# Altium PCB CoolantMonitor_MainBoard.PcbDoc
Units mil, origin at the board's own origin, x right, y up, seen from the top; angles counter-clockwise.
Board outline 4250 x 2625 mil, 2 copper layers (Top Layer, Bottom Layer); 46 components, 30 nets, 159 pads, 2 vias.
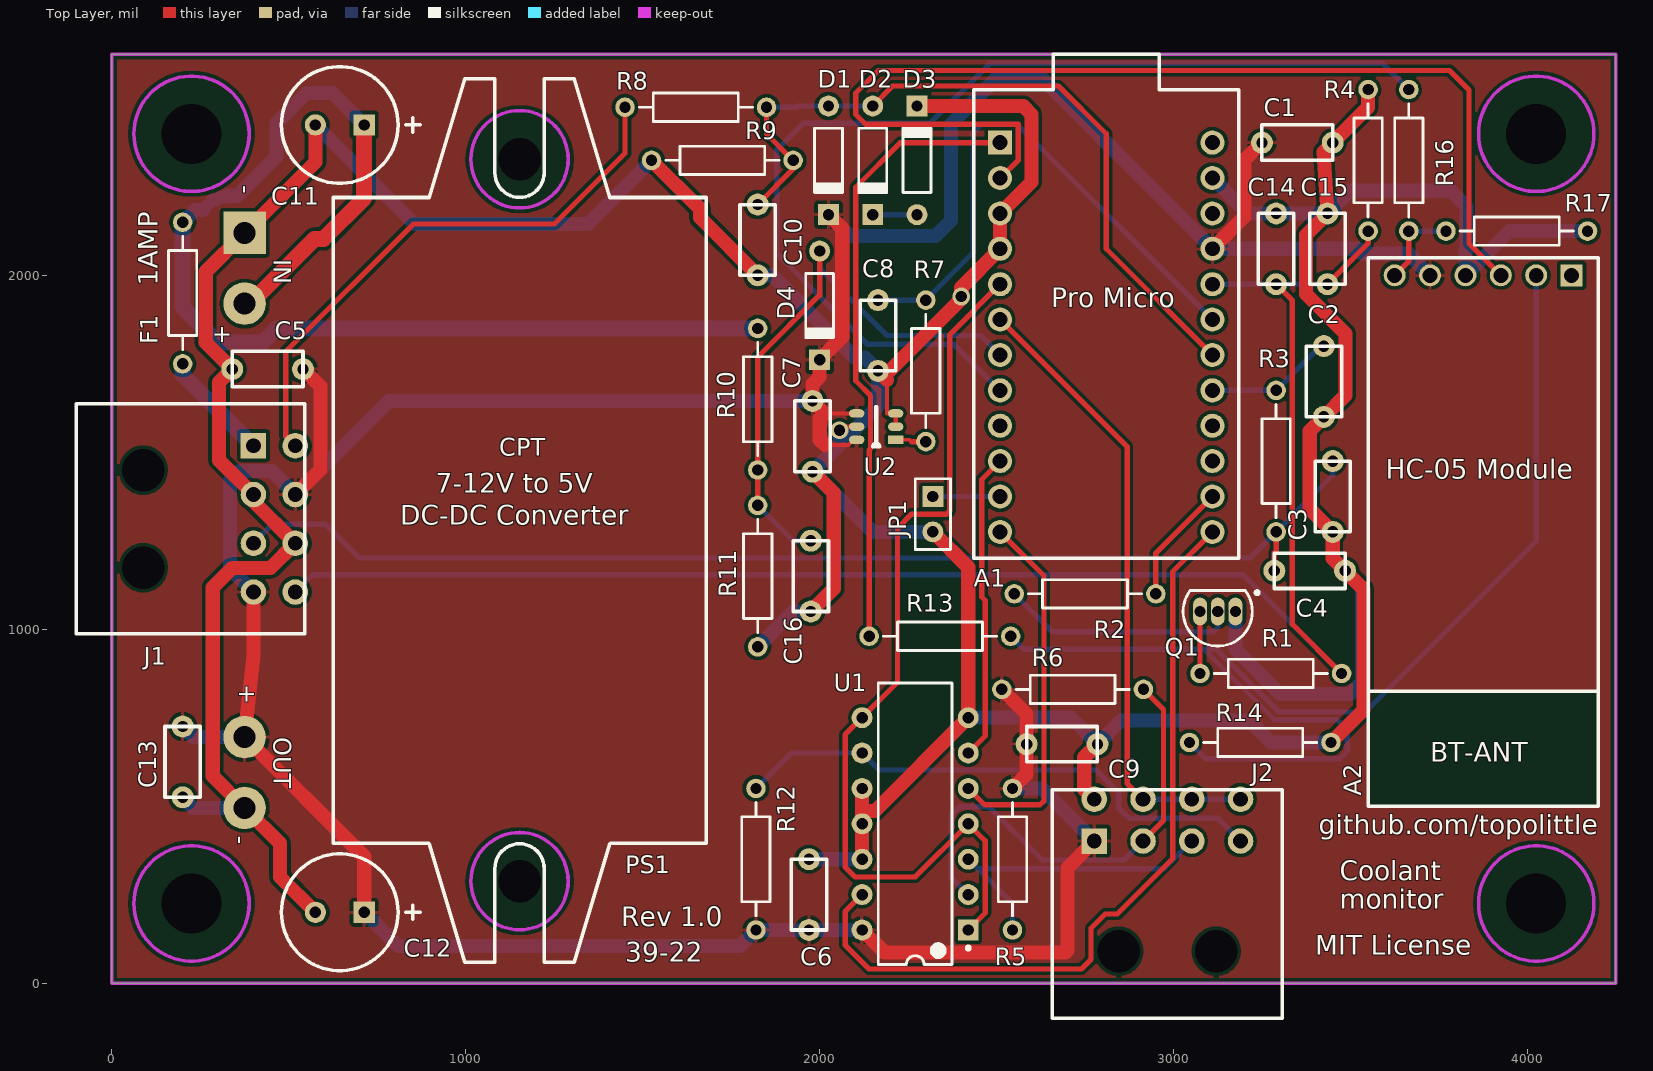
[diagram p0: Top Layer view]
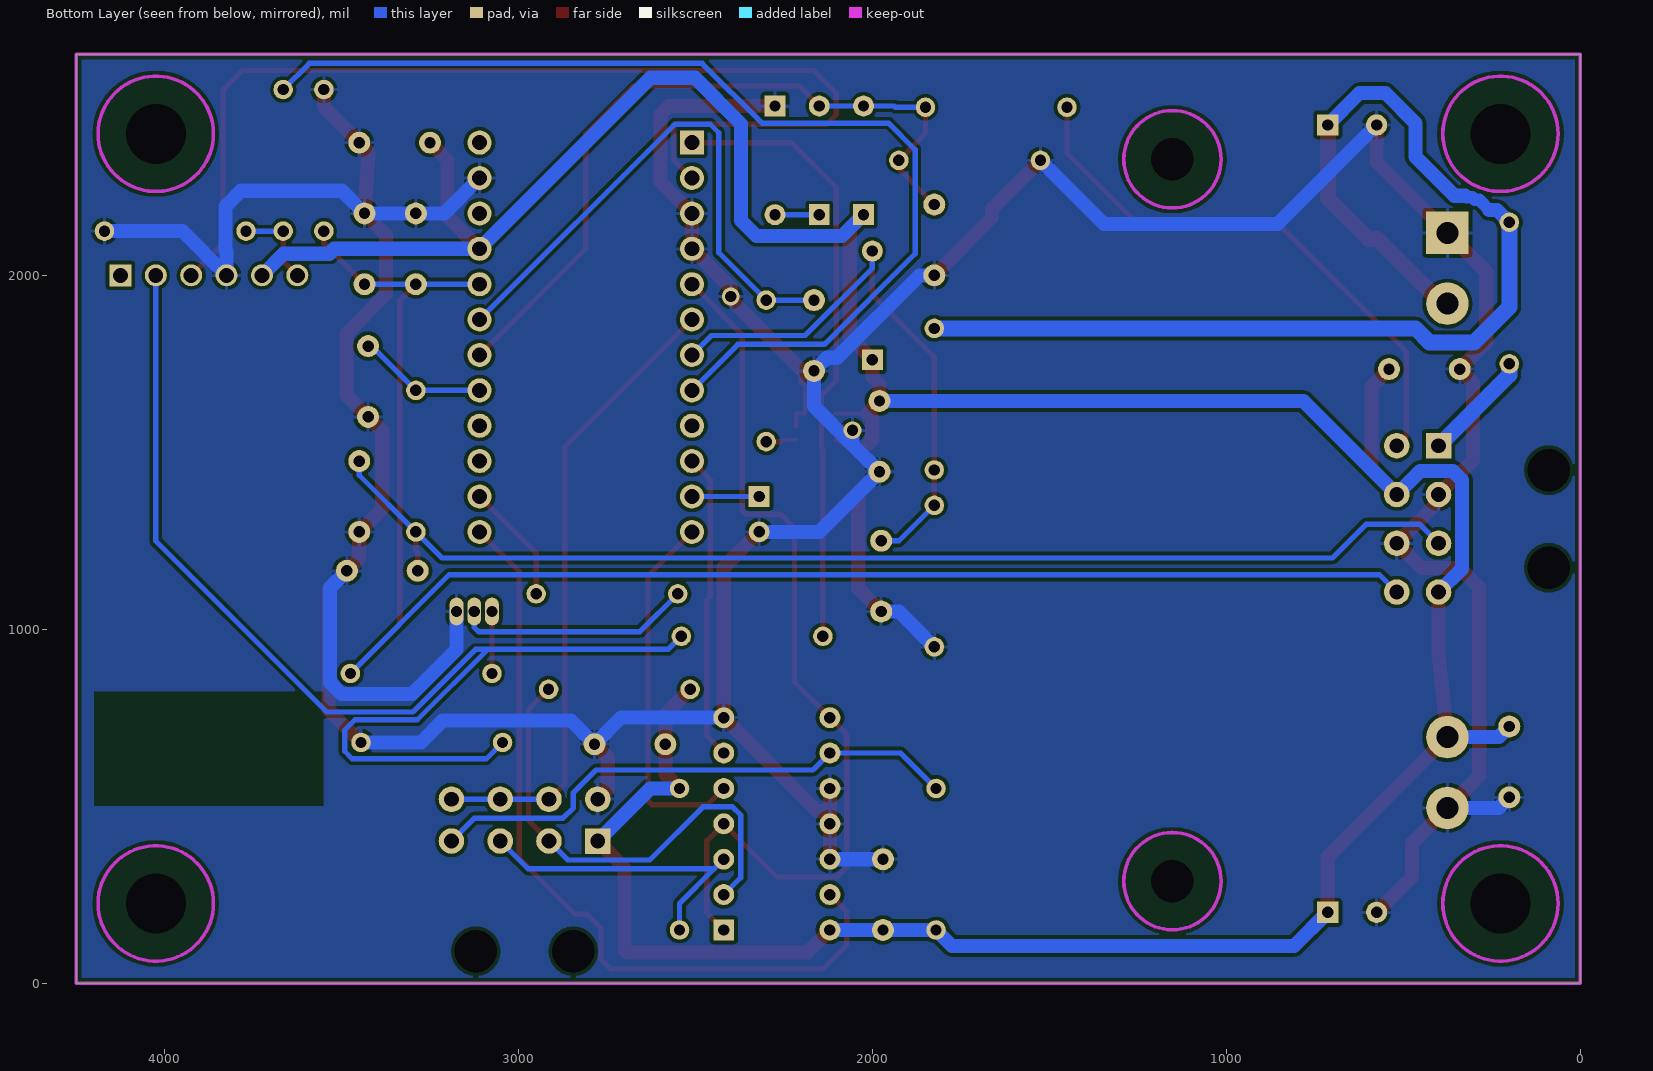
[diagram p1: Bottom Layer view, seen from below]

## Layer stack, top to bottom
Top Solder: solder mask 0.38, Solder Resist, Dk 3.5
Top Layer: signal copper 1.4
Dielectric 1: dielectric 12.6, FR-4, Dk 4.8
Bottom Layer: signal copper 1.4
Bottom Solder: solder mask 0.38, Solder Resist, Dk 3.5

## Board outline
0,0 0,2625 4250,2625 4250,0

## Design rules (kind name [scope] priority, off if disabled: settings)
Clearance [All] p1: gap=10 ignorepadtopadclearanceinfootprint=TRUE
ComponentClearance ComponentClearance_PS1 [InComponent('PS1')] p1: gap=0 collisioncheckmode=3 verticalgap=0 showdistances=FALSE
ComponentClearance [All] p2: gap=10 collisioncheckmode=3 verticalgap=100000 showdistances=FALSE
HoleSize [All] p1: absolutevalues=TRUE maxlimit=175 minlimit=25 maxpercent=80.000 minpercent=20.000
MinimumSolderMaskSliver [All] p1: minsoldermaskwidth=2
PolygonConnect [All] p1: connectstyle=Relief reliefconductorwidth=10 reliefentries=4 polygonreliefangle="90 Angle" airgapwidth=10
RoutingTopology "RoutingTopology Vert" [OnLayer('Bottom Layer')] p1: topology=Vertical
RoutingTopology "RoutingTopology Horz" [OnLayer('Top Layer')] p2: topology=Horizontal
RoutingVias [All] p1: holewidth=28 width=50 viastyle="Through Hole" minholewidth=28 minwidth=50 maxholewidth=28 maxwidth=50
SMDNeckDown [All] p1: percent=50.000
SilkToSolderMaskClearance [IsPad and not IsPad] p1: minsilkscreentomaskgap=10 clearancetoexposedcopper=TRUE
SolderMaskExpansion [All] p1: expansion=4
Width Power [InNetClass('Power')] p1: maxlimit=70 minlimit=10 preferedwidth=40
Width [All] p2: maxlimit=30 minlimit=10 preferedwidth=15
25 further rules are at their usual default settings.

## Classes and differential pairs
net class Power: +5VCC +12VCC GND NetF1_1

## Components (designator, comment, footprint, x,y, rotation, side; value= is the part's Value field where it differs from the comment)
A1 "DEV-12640 5V/16MHZ" ProMicro 2510,2375 r0 top
A2 "BT-HC05" BT-HC05 4125,2000 r180 top
C1 "" RAD_0.2_S 3450,2375 r180 top value=1uF
C2 "Cap" RAD_0.2_S 3425,1600 r90 top value=1uF
C3 "Cap" RAD_0.2_S 3450,1275 r90 top value=0.1nF
C4 "Cap" RAD_0.2_S 3485,1165 r180 top value=0.47uF
C5 "Cap" RAD_0.2_S 340,1735 r0 top value=1uF
C6 "Cap" RAD_0.2_S 1970,350 r270 top value=0.47uF
C7 "Cap" RAD_0.2_S 1980,1445 r90 top value=1uF
C8 "Cap" RAD_0.2_S 2165,1730 r90 top value=1uF
C9 "Cap" RAD_0.2_S 2785,675 r180 top value=0.47uF
C10 "" RAD_0.2_S 1825,2000 r90 top value=0.47uF
C11 "" RB_3.5MM 713,2425 r180 top value=470uF/16V
C12 "" RB_3.5MM 713,200 r180 top value=470uF
C13 "" RAD_0.2_S 200,525 r90 top value=0.1nF
C14 "Cap" RAD_0.2_S 3290,2175 r270 top value=0.1nF
C15 "Cap" RAD_0.2_S 3435,2175 r270 top value=1uF
C16 "Cap" RAD_0.2_S 1975,1050 r90 top value=1uF
D1 "1N4148" DO-35A 2025,2325 r270 top
D2 "1N4148" DO-35A 2150,2325 r270 top
D3 "1N4148" DO-35A 2275,2325 r90 top
D4 "1N4148" DO-35A 2000,1915 r270 top
F1 "500ma" AXIAL-0.4 200,1950 r90 top
J1 "Sensor / PWR connector" MOLEX_ULTRA_FIT_8_POS_RA 88.58,1449.49 r270 top locked value="Molex 1723162108"
J2 "To display" MOLEX_ULTRA_FIT_8_POS_RA 2845,90 r0 top value="Molex 1723162108"
JP1 "C/F Selector" HDR1X2 2320,1375 r270 top
PS1 "12V ->5V 3A" CPT_DC-DC 625,2220 r270 top
Q1 "2N7000" TO-92A 3125,1050 r90 top
R1 "Res1" AXIAL-0.4 3275,875 r0 top value=999
R2 "Res1" AXIAL-0.4 2750,1100 r0 top value=100
R3 "Res1" AXIAL-0.4 3290,1475 r90 top value=10
R4 "Res1" AXIAL-0.4 3550,2325 r270 top value=14.92K
R5 "Res1" AXIAL-0.4 2545,350 r90 top value=10K
R6 "Res1" AXIAL-0.4 2715,830 r180 top value=10K
R7 "" AXIAL-0.4 2300,1730 r90 top value=100
R8 "" AXIAL-0.4 1650,2475 r0 top value=10K
R9 "" AXIAL-0.4 1725,2325 r0 top value=4.7K
R10 "" AXIAL-0.4 1825,1650 r270 top value=3.90K
R11 "" AXIAL-0.4 1825,1150 r90 top value=1.50K
R12 "Res1" AXIAL-0.4 1820,350 r270 top value=10K
R13 "Res1" AXIAL-0.4 2340,980 r180 top value=1K
R14 "Res1" AXIAL-0.4 3245,680 r0 top value=2K
R16 "Res1" AXIAL-0.4 3665,2325 r90 top value=1K
R17 "Res1" AXIAL-0.4 3970,2125 r0 top value=2K
U1 "CD4066BE" DIP-14 2270,450 r180 top
U2 "MCP1502T-40E" SOT-6-S 2215,1535 r180 top

## Footprints (in the part's own frame and the unit in brackets; to place one, negate y for a bottom-side part, rotate by r counter-clockwise, add the part's x,y. Pads: shape width x height; smd on the part's side, far side on the other; paste and mask are expansions set on the pad)
AXIAL-0.4 [mm] "Axial Device, Thru-Hole; 2 Leads; 0.4 in Pin Spacing"
  round 1.4 hole 0.813: 1(-5.08,0) 2(5.08,0)
  silkscreen extent -4.06,-1.02 4.06,1.02
BT-HC05 [mil]
  rect 62x62 hole 42: 1(0,0)
  round 62 hole 42: 2(100,0) 3(200,0) 4(300,0) 5(400,0) 6(500,0)
  silkscreen extent -75,-50 575,1500
CPT_DC-DC [mil]
  rect 120x120 hole 62: 1(100,-250)
  round 120 hole 62: 2(300,-250) 3(1525,-250) 4(1725,-250)
  round 0 hole 120: ""(-108,527) ""(1932,527)
  silkscreen extent -335,0 2161,1055
DIP-14 [mm] "DIP; 14 Leads; Row Spacing 7.62 mm; Pitch 2.54 mm"
  rect 1.5x1.5 hole 0.813: 1(-3.81,7.62)
  round 1.5 hole 0.813: 2(-3.81,5.08) 3(-3.81,2.54) 4(-3.81,0) 5(-3.81,-2.54) 6(-3.81,-5.08) 7(-3.81,-7.62) 8(3.81,-7.62) 9(3.81,-5.08) 10(3.81,-2.54) 11(3.81,0) 12(3.81,2.54) 13(3.81,5.08) 14(3.81,7.62)
  silkscreen extent -3.94,-10.1 2.65,10.1, body extent -3.6,-10.1 3.6,10.1, height 5.08
DO-35A [mm] "Diode, Axial; Body 4.6 x 1.9 mm (LxDia. max), Lead Dia. 0.53 mm (max)"
  round 1.5 hole 0.813: 1(-3.9,0)
  rect 1.5x1.5 hole 0.813: 2(3.9,0)
  silkscreen extent -2.3,-1 2.4,1
HDR1X2 [mm] "Connector; Header; 2 Position"
  rect 1.5x1.5 hole 0.813: 1(0,0)
  round 1.5 hole 0.813: 2(2.54,0)
  silkscreen extent -1.27,-1.27 3.81,1.27
MOLEX_ULTRA_FIT_8_POS_RA [mil] "Molex Ultra-Fit 8 pos"
  rect 72x72 hole 42: 1(-68.9,311.42)
  round 72 hole 42: 2(-68.9,429.53) 3(68.9,311.42) 4(68.9,429.53) 5(206.69,311.42) 6(206.69,429.53) 7(344.49,311.42) 8(344.49,429.53)
  round 0 hole 120: ""(0,0) ""(275.59,0)
  silkscreen extent -187,-190 463,457
ProMicro [mil] "Adruino Pro Micro"
  rect 68x68 hole 42: 1(0,0)
  round 68 hole 42: 2(0,-100) 3(0,-200) 4(0,-300) 5(0,-400) 6(0,-500) 7(0,-600) 8(0,-700) 9(0,-800) 10(0,-900) 11(0,-1000) 12(0,-1100) 13(600,-1100) 14(600,-1000) 15(600,-900) 16(600,-800) 17(600,-700) 18(600,-600) 19(600,-500) 20(600,-400) 21(600,-300) 22(600,-200) 23(600,-100) 24(600,0)
  silkscreen extent -75,-1175 675,250
RAD_0.2_S [mil]
  round 62 hole 32: 1(0,0) 2(200,0)
  silkscreen extent 0,-50 200,50
RB_3.5MM [mil]
  rect 60x60 hole 32: 1(0,0)
  round 60 hole 32: 2(138,0)
  silkscreen extent -158,-165 234,165
SOT-6-S [mm]
  rect 1.1x0.6 smd: 1(0,0)
  oval 1.1x0.6 smd: 2(0,-0.95) 3(0,-1.9) 4(2.8,-1.9) 5(2.8,-0.95) 6(2.8,0)
  silkscreen extent 1.16,-2.38 1.64,0.48
TO-92A [mm] "TO, Flat Index; 3 In-Line, Axial Leads; Body Dia. 4.5mm; Leads 0.51 x 0.48 mm (max)"
  oval 2x1 hole 0.813: 1(0,-1.27) 2(0,0) 3(0,1.27)
  silkscreen extent -2.48,-2.96 1.5,2.48, body extent -2.48,-2.5 1.5,2.5, height 6.86

## Part data
A1: library part ProMicro, "Arduino MCU"
C1 C10 C13: library part Cap, "Capacitor", LatestRevisionDate=17-Jul-2002, LatestRevisionNote="Re-released for DXP Platform.", PackageDescription="Radial Cap, Thru-Hole; 2 Leads; 0.3 in Pin Spacing", PackageReference=RAD-0.3, Published=8-Jun-2000, Publisher="Altium Limited"
C2 C3 C4 C5 C6 C7 C8 C9 C14 C15 C16: "Capacitor", LatestRevisionDate=17-Jul-2002, LatestRevisionNote="Re-released for DXP Platform.", PackageDescription="Radial Cap, Thru-Hole; 2 Leads; 0.3 in Pin Spacing", PackageReference=RAD-0.3, Published=8-Jun-2000, Publisher="Altium Limited"
C11 C12: library part "Cap Pol1", "Polarized Capacitor (Radial)", LatestRevisionDate=17-Jul-2002, LatestRevisionNote="Re-released for DXP Platform.", PackageDescription="Polarized Capacitor (Radial); 2 Leads", PackageReference=RB7.6-15, Published=8-Jun-2000, Publisher="Altium Limited"
D1 D2 D3 D4: library part "Diode 1N4148", "High Conductance Fast Diode", Code_JEDEC=DO-204-AH, ComponentLink1Description="Manufacturer Link", ComponentLink1URL=http://www.fairchildsemi.com/, ComponentLink2Description=Datasheet, ComponentLink2URL=http://www.fairchildsemi.com/ds/1N%2F1N4148.pdf, DatasheetVersion=1997, LatestRevisionDate=17-Jul-2002, LatestRevisionNote="Re-released for DXP Platform.", PackageDescription="Diode, Axial; Body 3.8 x 1.9 mm (LxDia. max), Lead Dia. 0.53 mm (max)", PackageReference=DO-35, Published=8-Jun-2000, Publisher="Altium Limited"
F1: library part "Fuse 2", "Fuse", LatestRevisionDate=17-Jul-2002, LatestRevisionNote="Re-released for DXP Platform.", PackageDescription="Thru-Hole; 2 Leads", PackageReference=PIN-W2/E2.8, Published=8-Jun-2000, Publisher="Altium Limited"
J1: library part SENS_INTERFACE_RX8
J2: library part TRIPLE_DISPLAY_RX8, "8 Pins connector"
JP1: library part "Header 2", "Header, 2-Pin", LatestRevisionDate=17-Jul-2002, LatestRevisionNote="Re-released for DXP Platform.", Publisher="Altium Limited"
PS1: library part CPT_DC-DC, "CPT DC-DC 12V/5V 3A"
Q1: library part MOSFET-N, "N-Channel MOSFET", LatestRevisionDate=17-Jul-2002, LatestRevisionNote="Re-released for DXP Platform.", PackageDescription="TO, Flat Index; 3 In-Line, Axial Leads; Body Dia. 4.6mm; Lead Dia. 0.5 mm (max)", PackageReference=E3, PackageVersion=1995/1996, Published=8-Jun-2000, Publisher="Altium Limited"
R1 R2 R3 R4 R5 R6 R12 R13 R14 R16 R17: "Resistor", LatestRevisionDate=17-Jul-2002, LatestRevisionNote="Re-released for DXP Platform.", PackageDescription="Axial Device, Thru-Hole; 2 Leads; 0.3 in Pin Spacing", PackageReference=AXIAL-0.3, Published=8-Jun-2000, Publisher="Altium Limited"
R7 R8 R9 R10 R11: library part Res1, "Resistor", LatestRevisionDate=17-Jul-2002, LatestRevisionNote="Re-released for DXP Platform.", PackageDescription="Axial Device, Thru-Hole; 2 Leads; 0.3 in Pin Spacing", PackageReference=AXIAL-0.3, Published=8-Jun-2000, Publisher="Altium Limited"
U1: "Quad bilateral switch"
U2: library part MCP1502, "Voltage reference"

## Free pads (board coordinates)
  round 0 hole 169.5: ""(225,225) ""(225,2400) ""(4025,225) ""(4025,2400)

## Via types
v1: diameter 50, hole 32, Top Layer to Bottom Layer, 2 vias

## Nets (pads, with @x,y where several pads share a name; then routed paths per layer and width w, separated by ;. In a path a pad name is that pad's centre, name@x,y a point inside that pad or via, vN(x,y) a via of type N, cw(c..) or ccw(c..) an arc to the next point about the centre after c; other vN are vias at no path point)
+5VCC: A1.21 A2.5 C1.2 C5.2 C6.2 C7.2 C9.2 C12.1 C13.2 D1.2 D4.2 J1.4 J1.7 J2.1 PS1.3 R5.2 R6.2 R12.2 U1.14 U2.4 U2.6 | length 10382.5
  Top Layer w11.81: 2014.71,1520.4 2081.42,1520.4 2096.02,1535 U2.6 ; 2014.91,1609.8 2015.2,1609.8 U2.4
  Top Layer w40: J1.7 400,925 PS1.3 713,357 C12.1 ; J1.4 589,1451.48 589,1686 C5.2 ; 2014.71,1520.4 2000.11,1535 2000.11,1595 2014.91,1609.8 ; 2015.2,1609.8 C7.2 1980,1693 2000,1713 D4.2 2064,1825.46 2064,2132.46 D1.2 ; U1.14 2184,86 2694,86 2700,92 2700,325.32 J2.1 ; R6.2 2585,760 C9.2 2585,590 R5.2 ; A1.21 3201,2166 3201,2326 C1.2
  Bottom Layer w40: C13.2 230,695 PS1.3 ; J1.7 334,1171 334,1421 360,1447 451.7,1447 J1.4 782.52,1645 C7.2 ; C12.1 808,105 1775,105 R12.2 C6.2 U1.14 ; D1.2 2085.46,2111 2327,2111 2371,2155 2371,2428 2501.5,2558.5 2626.5,2558.5 A1.21 3521,2075 3535,2061 3664,2061 A2.5 ; R5.2 2627.52,550 J2.1
+12VCC: C11.1 F1.2 PS1.2 R10.1 | length 3348.5
  Top Layer w45: PS1.2 390,1920 573,2103 598,2103 713,2218 C11.1
  Bottom Layer w35: 256.63,2185 285.48,2213.85 297.64,2213.85 304.72,2220.94 320.94,2220.94 325,2225
  Bottom Layer w40: F1.2 235,2185 256.63,2185 ; 325,2225 355,2225 465,2335 465,2430 550,2515 623,2515 C11.1
  Bottom Layer w45: F1.2 200,1910 300,1810 425,1810 465,1850 R10.1
GND: A1.3 A1.4 A1.23 A2.4 C1.1 C2.1 C3.1 C4.1 C5.1 C6.1 C7.1 C8.1 C9.1 C10.1 C11.2 C12.2 C13.1 C14.1 C15.1 C16.1 D3.2 J1.3 J1.6 J2.2 JP1.2 PS1.1 PS1.4 Q1.1 R4.1 R9.1 R11.1 R14.2 R17.2 U1.7 U1.10 U1.11 U1.12 U2.2 U2.3 U2.5 | length 14945.4
  Top Layer w11.81: v1(2056,1562) 2066.4,1572.4 U2.5 ; 2190,1705 2190,1609.8 U2.3 U2.2
  Top Layer w40: C12.2 475,300 475,395 PS1.4 285,585 285,1118 340,1173 448.31,1173 J1.6 400,1360.91 J1.3 303,1477.59 303,1698 C5.1 265,1810 265,2010 PS1.1 575,2320 C11.2 ; R9.1 1662,2188 1662,2163 C10.1 ; C16.1 2040,1115 2040,1385 C7.1 ; U1.12 U1.11 2120,486 ; U1.10 2120,486 ; 2190,1705 C8.1 2197,1730 2400,1933 v1(2400,1940) 2400,1965 A1.4 A1.3 2599,2264 2599,2455 2575.46,2478.54 D3.2 ; JP1.2 2420,1175 U1.7 2156,486 2120,486 ; J2.2 2748,547.63 2748,638 C9.1 ; R14.2 3537,772 3537,1113 C4.1 3450,1200 C3.1 3385,1340 3385,1560 C2.1 3486,1661 3486,1835 3374,1947 3374,2114 C15.1 3424,2349 C1.1 3550,2475 R4.1
  Bottom Layer w40: C13.1 230,495 PS1.4 ; C11.2 855,2145 1345,2145 R9.1 ; R11.1 1925,1050 C16.1 ; C10.1 1867.13,2000 2100,1767.13 2127.87,1767.13 C8.1 2165,1630 2056,1521 ; C6.1 U1.12 ; v1(2056,1562) 2056,1521 ; JP1.2 2150,1275 C7.1 2056,1521 ; U1.7 2710,750 C9.1 2852,742 3214,742 3276,680 R14.2 ; A1.23 3210,2175 C14.1 C15.1 3499,2239 3784,2239 3828,2195 3828,2070 3825,2067 A2.4 3950,2125 R17.2 ; Q1.1 3175,943 3301,817 3500,817 3533,850 3533,1117 C4.1
NetA1_1: A1.1 R13.2 | length 1748.2
  Top Layer w15: R13.2 2140,1506 2144,1510 2144,1660 2102,1702 2102,2249 2228,2375 A1.1
NetA1_2: A1.2 A2.3 | length 3048
  Top Layer w15: A1.2 2561.5,2326.5 2561.5,2427 2130,2427 2102,2455 2102,2515 2166,2579 3780,2579 3835,2524 3835,2090 A2.3
NetA1_5: A1.5 U1.1 U1.4 U1.8 | length 2647.3
  Top Layer w15: U1.1 2468,198 2468,402 U1.4 2270,300 2100,300 2072,328 2072,702 U1.8 2220,850 2220,1285 2260,1325 2358,1325 2368,1335 2368,1833 A1.5
NetA1_6: A1.6 J2.4 J2.6 J2.8 | length 1798.4
  Top Layer w15: A1.6 2869,1516 2869,564.43 J2.4
  Bottom Layer w15: J2.4 J2.6 J2.8
NetA1_7: A1.7 C16.2 D4.1 R10.2 R11.2 | length 1642.5
  Top Layer w15: R11.2 R10.2 1825,1769 2000,1944 D4.1
  Bottom Layer w15: R11.2 1925,1250 C16.2 ; D4.1 2000,2020 2190,1830 2455,1830 A1.7
NetA1_8: A1.8 R16.2 | length 3002.6
  Bottom Layer w15: A1.8 2380,1805 2135,1805 1879,2061 1879,2355 1954,2430 2312,2430 2481,2599 3591,2599 R16.2
NetA1_10: A1.10 U1.6 | length 870.6
  Top Layer w15: U1.6 2468,698 2468,1081 2458,1091 2458,1423 A1.10
NetA1_11: A1.11 JP1.1 | length 190
  Bottom Layer w15: JP1.1 A1.11
NetA1_12: A1.12 U1.5 | length 1049
  Top Layer w15: U1.5 2466,504 2623,504 2634,515 2634,1151 A1.12
NetA1_13: A1.13 U1.13 | length 2266.2
  Top Layer w15: U1.13 2072,202 2072,108 2140,40 2740,40 2767,67 2767,155 2807,195 2841,195 2998,352 2998,1163 A1.13
NetA1_14: A1.14 R2.2 | length 341.3
  Top Layer w15: R2.2 2950,1215 A1.14
NetA1_17: A1.17 C2.2 R3.2 | length 366.8
  Bottom Layer w15: A1.17 R3.2 3415,1800 C2.2
NetA1_19: A1.19 C8.2 R7.2 | length 1578.1
  Bottom Layer w15: C8.2 R7.2 2434,2064 2434,2403 2458,2427 2558,2427 A1.19
NetA1_20: A1.20 C14.2 C15.2 J1.8 R1.2 R4.2 | length 4792
  Top Layer w15: C14.2 3336,1929 3336,1014 R1.2 ; C15.2 3550,2090 R4.2
  Bottom Layer w15: J1.8 567.11,1154 3196,1154 R1.2 ; A1.20 C14.2 C15.2
NetA2_2: A2.2 R13.1 R14.1 | length 3556.9
  Bottom Layer w15: R13.1 2577,943 3087,943 ; R14.1 3091,634 3470,634 3491,655 3491,715 3462,744 3286,744 3087,943 ; A2.2 4025,1249 3542,766 3298,766 3121,943 3087,943
NetA2_6: A2.6 R16.1 R17.1 | length 246.6
  Top Layer w15: A2.6 3665,2040 R16.1
  Bottom Layer w15: R16.1 R17.1
NetC3_2: C3.2 C4.2 J1.5 R3.1 | length 3361.2
  Top Layer w15: C4.2 3285,1217 3290,1222 R3.1
  Bottom Layer w15: J1.5 454.2,1297 604,1297 700,1201 3216,1201 R3.1 3450,1435 C3.2
NetD2_2: D2.2 D3.1 | length 125
  Bottom Layer w15: D2.2 D3.1
NetF1_1: F1.1 J1.1 | length 314.5
  Bottom Layer w45: F1.1 200,1718.39 J1.1
NetJ1_2: J1.2 R8.1 | length 1598.2
  Top Layer w15: J1.2 491,1545.5 491,1784 852,2145 1250,2145 1450,2345 R8.1
NetJ2_3: J2.3 R6.1 U1.2 | length 1356.9
  Top Layer w15: J2.3 2972,459.52 2972,773 R6.1
  Bottom Layer w15: U1.2 2372,298 2372,475 2395,498 2479,498 2629.08,347.92 2860.4,347.92 J2.3
NetJ2_5: J2.5 R5.1 U1.3 | length 888.9
  Bottom Layer w15: U1.3 2447.08,322.92 ; R5.1 2545,225 2447.08,322.92 ; J2.5 2973.19,322.92 2447.08,322.92
NetJ2_7: J2.7 R12.1 U1.9 | length 1539.1
  Bottom Layer w15: R12.1 1920,650 U1.9 2168,602 2781,602 2845,538 2845,495 2874,466 3124.91,466 J2.7
NetQ1_1: Q1.3 R1.1 | length 175
  Top Layer w15: R1.1 Q1.3
NetQ1_2: Q1.2 R2.1 | length 669.3
  Bottom Layer w15: R2.1 2657,993 3113,993 3125,1005 Q1.2
NetR7_1: R7.1 U2.1 | length 87.1
  Top Layer w10: U2.1 2255,1535 2260,1530
  Top Layer w15: 2260,1530 R7.1
NIGHT_LIGHT: A1.18 C10.2 D1.1 D2.1 R8.2 R9.2 | length 2137.5
  Top Layer w15: C10.2 1925,2300 R9.2 1850,2400 R8.2 ; D2.1 2206.46,2535 2675,2535 2810,2400 2810,2075 A1.18
  Bottom Layer w15: R8.2 1935,2475 1938.54,2478.54 D1.1 D2.1
pads on no net: A1.9 A1.15 A1.16 A1.22 A1.24 A2.1 J1. J2. PS1.

## Polygon pours and split planes (outlines as drawn)
GND on Bottom Layer "GND" (solid, pour order 6): 4200,825 4200,500 4250,500 4250,825
GND on Bottom Layer "GND" (solid, remove dead copper, pour order 2): 0,2625 4250,2625 4250,825 3550,825 3550,500 4250,500 4250,0 0,0
+5VCC on Top Layer "+5VCC" (solid, pour order 12): 4234.71,825 4200,825 4200,500 4234.71,500
+5VCC on Top Layer "+5VCC" (solid, remove dead copper, pour order 10): 0,0 4250,0 4250,500 3550,500 3550,825 4250,825 4250,2625 0,2625

## Keep-outs
Keep-Out Layer:
  circle w10: c225,225 r163
  circle w10: c225,2400 r163
  circle w10: c4025,2400 r163
  circle w10: c4025,225 r163
  circle w10: c1152,2328 r137.5
  circle w10: c1152,288 r137.5
  lines w10: 0,0 0,2625 4250,2625 4250,0 0,0

## Silkscreen, mask and mechanical layers (free items; w line width, h text height)
Top Overlay:
  text "1AMP" at 130,1970 h55 r90
  text "Pro Micro" at 2655,1910 h55
  text "7-12V to 5V" at 915,1385 h55
  text "DC-DC Converter" at 815,1295 h55
  text "github.com/topolittle" at 3410,420 h55
  text "Coolant" at 3470,290 h55
  text "monitor" at 3470,210 h55
  text "Rev 1.0" at 1440,160 h55
  text "MIT License" at 3400,80 h55
  text "39-22" at 1450,60 h55
Mechanical 1 (Mech4):
  the board outline again, w5

## Dimensions
225,2400 to -180,2665 on Mechanical 2
225,2400 to 225,225 on Mechanical 2
225,2400 to 4025,2400 on Mechanical 2
4250,2625 to 4250,0 on Mechanical 2
0,0 to 4250,0 on Mechanical 2

## Text inside footprints (layer, text, board x,y; h text height)
A2: Top Overlay "BT-ANT" at 3725,625 h55; Top Overlay "HC-05 Module" at 3600,1425 h55
PS1: Top Overlay "CPT" at 1095,1490 h50; Top Overlay "IN" at 457,2045 h50 r270; Top Overlay "OUT" at 457,695 h50 r270; Top Overlay "+" at 290,1860 h50 r270; Top Overlay "+" at 360,845 h50 r270; Top Overlay "-" at 355,2255 h50 r270; Top Overlay "-" at 341,416 h50 r270